# Altium PCB GIC.PcbDoc
Units mm, origin at the board's own origin, x right, y up, seen from the top; angles counter-clockwise.
Board outline 50 x 50 mm, 2 copper layers (Top Layer, Bottom Layer); 19 components, 10 nets, 43 pads, 0 vias.
Unrouted connection lines stored in the file: 1.
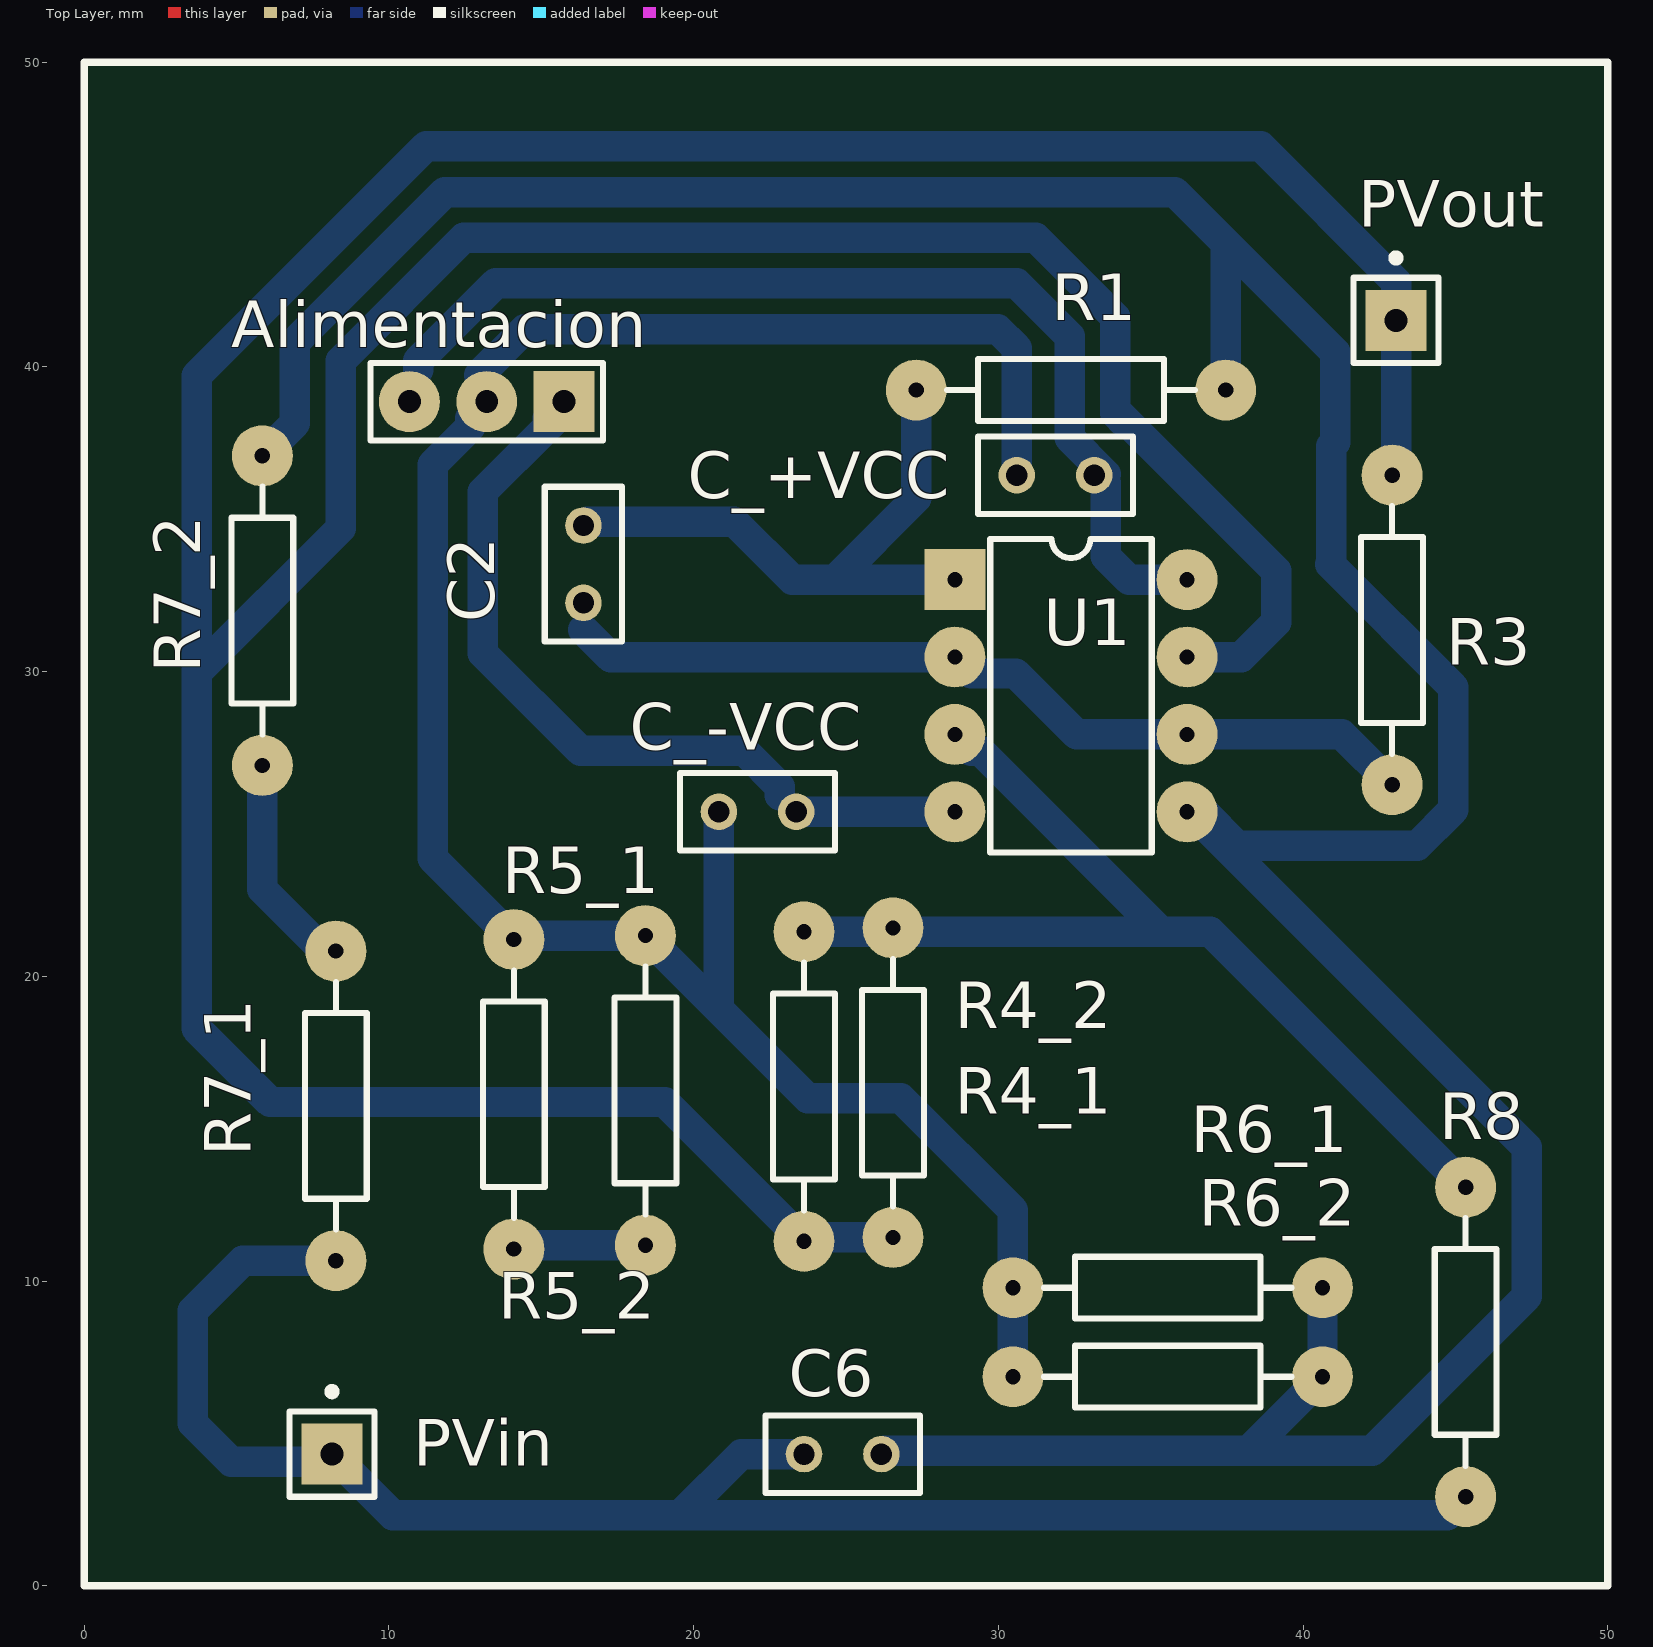
[diagram p0: Top Layer view]
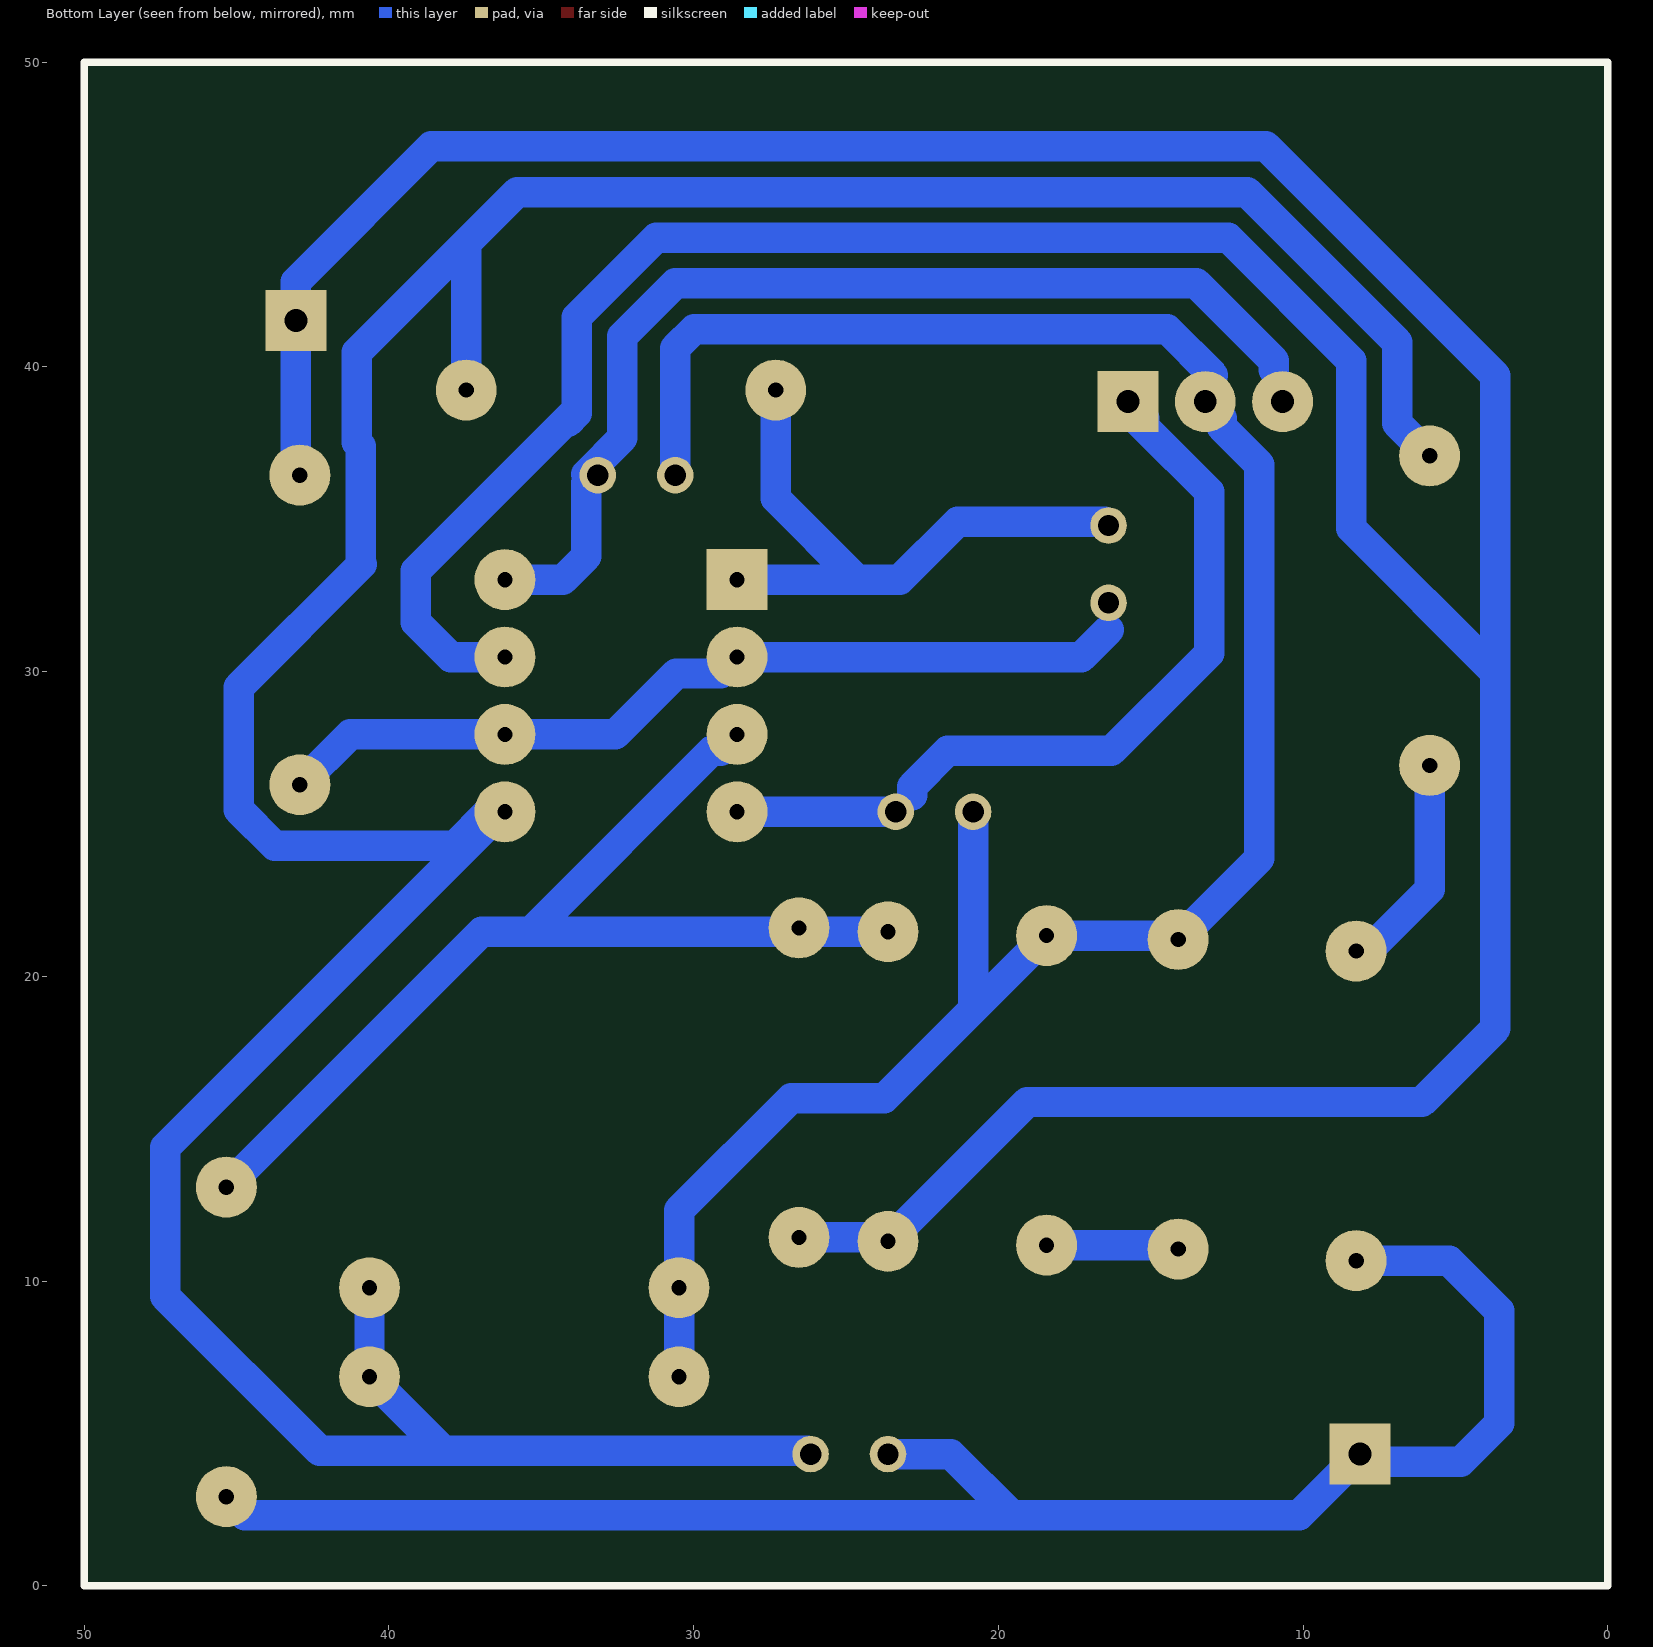
[diagram p1: Bottom Layer view, seen from below]

## Layer stack, top to bottom
Top Layer: signal copper 0.0356
Dielectric: dielectric 0.32, FR-4, Dk 4.8
Bottom Layer: signal copper 0.0356

## Board outline
0,0 50,0 50,50 0,50

## Design rules (kind name [scope] priority, off if disabled: settings)
Clearance [All] p1: gap=0.5
PolygonConnect [All] p1: connectstyle=Relief reliefconductorwidth=0.254 reliefentries=4 polygonreliefangle="90 Angle"
RoutingVias [All] p1: holewidth=0.711 width=1.27 viastyle="Through Hole" minholewidth=0.711 minwidth=1.27 maxholewidth=0.711 maxwidth=1.27
SilkscreenOverComponentPads [All] p1: minsilkscreentomaskgap=0.254
SolderMaskExpansion [All] p1: expansion=0.102
Width [All] p1: maxlimit=1 minlimit=1 preferedwidth=1
27 further rules are at their usual default settings.

## Components (designator, comment, footprint, x,y, rotation, side; value= is the part's Value field where it differs from the comment)
Alimentacion "Header 3" HDR1X3 15.748,38.862 r180 top
C2 "Cap" RAD-0.1 16.383,33.528 r270 top
C6 "Cap" RAD-0.1 24.892,4.318 r180 top
C_+VCC "Cap" RAD-0.1 31.877,36.449 r0 top
C_-VCC "Cap" RAD-0.1 22.098,25.4 r180 top
PVin "Plug" PIN1 8.128,4.318 r0 top
PVout "Plug" PIN1 43.053,41.529 r0 top
R1 "Res2" AXIAL-0.4 32.385,39.243 r180 top
R3 "Res2" AXIAL-0.4 42.926,31.369 r90 top
R4_1 "Res2" AXIAL-0.4 23.622,16.383 r90 top
R4_2 "Res2" AXIAL-0.4 26.543,16.51 r90 top
R5_1 "Res2" AXIAL-0.4 14.097,16.129 r270 top
R5_2 "Res2" AXIAL-0.4 18.415,16.256 r270 top
R6_1 "Res2" AXIAL-0.4 35.56,9.779 r0 top
R6_2 "Res2" AXIAL-0.4 35.56,6.858 r0 top
R7_1 "Res2" AXIAL-0.4 8.255,15.748 r90 top
R7_2 "Res2" AXIAL-0.4 5.842,32.004 r90 top
R8 "Res2" AXIAL-0.4 45.339,8.001 r270 top
U1 "TL082JG" JG008 32.385,29.21 r270 top

## Footprints (in the part's own frame and the unit in brackets; to place one, negate y for a bottom-side part, rotate by r counter-clockwise, add the part's x,y. Pads: shape width x height; smd on the part's side, far side on the other; paste and mask are expansions set on the pad)
AXIAL-0.4 [mm] "Axial Device, Thru-Hole; 2 Leads; 0.4 in Pin Spacing"
  round 2 hole 0.5: 1(-5.08,0) 2(5.08,0)
  silkscreen extent -4.06,-1.02 4.06,1.02
HDR1X3 [mm] "Connector; Header; 3 Position"
  rect 2x2 hole 0.75: 1(0,0)
  round 2 hole 0.75: 2(2.54,0) 3(5.08,0)
  silkscreen extent -1.27,-1.27 6.35,1.27
JG008 [mm] "DIP; 8 Leads; Row Spacing 7.62 mm; Pitch 2.54 mm"
  rect 2x2 hole 0.5: 1(-3.81,-3.81)
  round 2 hole 0.5: 2(-1.27,-3.81) 3(1.27,-3.81) 4(3.81,-3.81) 5(3.81,3.81) 6(1.27,3.81) 7(-1.27,3.81) 8(-3.81,3.81)
  silkscreen extent -5.15,-2.65 5.15,2.65
PIN1 [mm] "Connector; Plug"
  rect 2x2 hole 0.75: 1(0,0)
  silkscreen extent -1.4,-1.4 1.4,2.17
RAD-0.1 [mm] "Radial Cap, Thru-Hole; 2 Leads; 0.1 in Pin Spacing"
  round 1.2 hole 0.7: 1(-1.27,0) 2(1.27,0)
  silkscreen extent -2.54,-1.27 2.54,1.27

## Part data
Alimentacion: "Header, 3-Pin"
C2 C6 C_+VCC C_-VCC: "Capacitor"
R1 R3 R4_1 R4_2 R5_1 R5_2 R6_1 R6_2 R7_1 R7_2 R8: "Resistor"
U1: "JFET-Input Operational Amplifier"

## Nets (pads, with @x,y where several pads share a name; then routed paths per layer and width w, separated by ;. In a path a pad name is that pad's centre, name@x,y a point inside that pad or via, vN(x,y) a via of type N, cw(c..) or ccw(c..) an arc to the next point about the centre after c; other vN are vias at no path point)
+VCC: Alimentacion.3 C_+VCC.2 U1.8 | length 33.9
  Bottom Layer w1: 10.954,39.91 10.954,40.198 13.499,42.743 26.614,42.743 30.607,42.743 32.339,41.011 32.339,37.673 C_+VCC.2@33.528,36.483 ; C_+VCC.2@33.528,36.195 33.528,33.782 34.29,33.02 U1.8
-VCC: Alimentacion.1 C_-VCC.1 U1.4 | length 27.2
  Bottom Layer w1: Alimentacion.1@15.748,38.574 Alimentacion.1@15.208,38.034 ; Alimentacion.1 15.208,38.322 Alimentacion.1@15.208,38.034 ; 22.828,25.94 22.828,26.228 21.656,27.4 16.288,27.4 13.081,30.607 13.081,35.907 Alimentacion.1@15.208,38.034 ; C_-VCC.1 U1.4
GND: Alimentacion.2 C_+VCC.1 C_-VCC.2 R5_1.1 R5_2.1 R6_1.1 R6_2.1 | length 73.4
  Bottom Layer w1: Alimentacion.2@12.668,38.322 12.668,38.034 11.43,36.796 11.43,23.876 R5_1.1 ; Alimentacion.2@12.954,39.736 14.461,41.243 29.986,41.243 30.607,40.622 C_+VCC.1 ; R5_1.1@14.224,21.336 R5_2.1 20.828,18.923 ; C_-VCC.2 20.828,18.923 ; R6_2.1 R6_1.1 30.48,12.319 26.797,16.002 23.749,16.002 20.828,18.923
NetC2_1: C2.1 R1.2 U1.1 | length 20.2
  Bottom Layer w1: C2.1@16.51,34.925 21.336,34.925 23.241,33.02 24.638,33.02 ; R1.2 27.305,35.687 24.638,33.02 ; U1.1 24.638,33.02
NetC2_2: C2.2 R3.1 U1.2 U1.6 | length 28.6
  Bottom Layer w1: 16.383,31.369 17.272,30.48 U1.2 29.115,29.94 30.575,29.94 32.575,27.94 U1.6 41.275,27.94 R3.1
NetC6_1: C6.1 R1.1 R6_1.2 R6_2.2 R7_2.2 U1.5 | length 123.8
  Bottom Layer w1: R7_2.2 6.914,38.156 6.914,40.82 11.837,45.743 35.791,45.743 37.465,44.069 ; C6.1@26.265,4.421 38.203,4.421 ; U1.5 U1.5@36.322,25.4 ; R1.1 37.465,44.069 ; R6_1.2 R6_2.2 38.203,4.421 ; U1.5@36.322,25.4 36.735,25.4 37.846,24.289 43.754,24.289 44.926,25.461 44.926,29.496 40.894,33.528 40.926,33.56 40.926,37.404 41.053,37.531 41.053,40.481 37.465,44.069 ; U1.5@36.322,25.4 47.339,14.383 47.339,9.493 42.267,4.421 38.203,4.421
NetC6_2: C6.2 PVin.1 R7_1.1 R8.2 | length 57.1
  Bottom Layer w1: PVin.1@7.874,4.064 4.826,4.064 3.556,5.334 3.556,9.017 5.207,10.668 R7_1.1 ; PVin.1 10.128,2.318 19.558,2.318 ; C6.2 21.558,4.318 19.558,2.318 ; R8.2 44.736,2.318 19.558,2.318
NetPVout_1: PVout.1 R3.2 R4_1.1 R4_2.1 U1.7 | length 154.2
  Bottom Layer w1: R4_2.1 23.749,11.43 R4_1.1 19.05,15.875 6.096,15.875 3.683,18.288 3.683,29.972 ; 33.943,38.481 34.229,38.195 ; U1.7 37.973,30.48 39.116,31.623 39.116,33.308 34.229,38.195 ; R3.2@43.053,36.576 PVout.1 43.053,42.799 38.609,47.243 11.216,47.243 3.683,39.71 3.683,29.972 ; 3.683,29.972 8.414,34.703 8.414,40.198 12.459,44.243 31.228,44.243 33.839,41.633 33.839,38.481 34.125,38.195 34.229,38.195
NetR4_1_2: R4_1.2 R4_2.2 R5_1.2 R5_2.2 R8.1 U1.3 | length 38.8
  Bottom Layer w1: R5_1.2@14.224,11.176 R5_2.2 ; R4_1.2 35.34,21.463 ; U1.3 29.115,27.4 29.403,27.4 35.34,21.463 ; R8.1 36.957,21.463 35.34,21.463
NetR7_1_2: R7_1.2 R7_2.1 | length 7.5
  Bottom Layer w1: R7_2.1 5.842,22.86 7.874,20.828 R7_1.2 R7_1.2@8.128,20.955

## Silkscreen, mask and mechanical layers (free items; w line width, h text height)
Top Overlay:
  the board outline again, w0.254
Bottom Overlay:
  lines w0.254: 0,0 50,0 ; 0,0 0,50 50,50 50,0 ; 0,0 50,0